# Altium PCB 5_STM32H743.PcbDoc
Units mil, origin at the board's own origin, x right, y up, seen from the top; angles counter-clockwise.
Board outline 1968.5 x 1968.5 mil, 2 copper layers (Top Layer, Bottom Layer); 60 components, 104 nets, 337 pads, 46 vias.
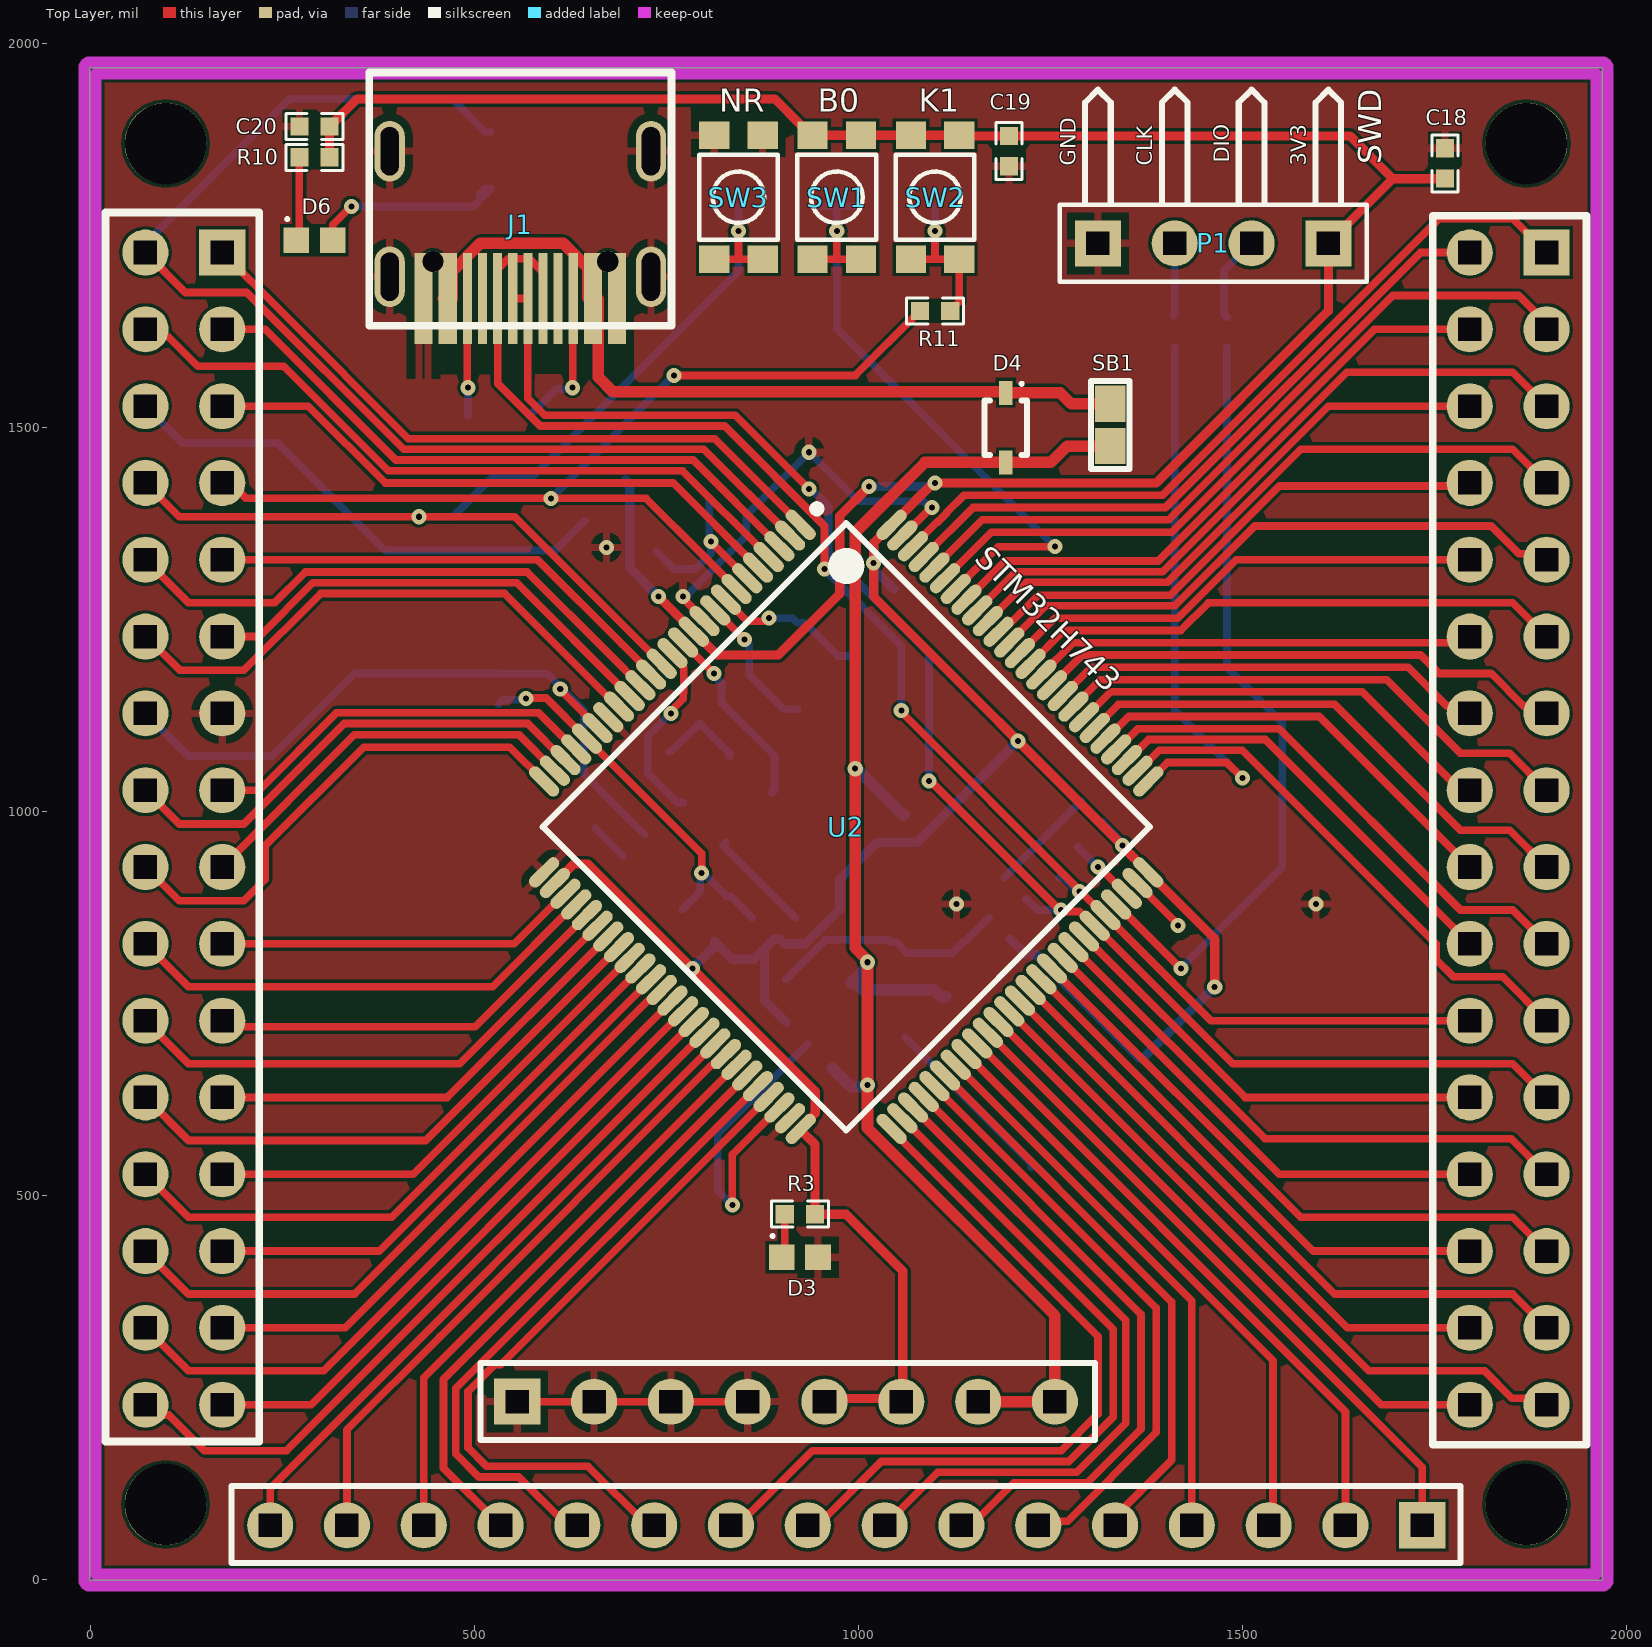
[diagram p0: Top Layer view]
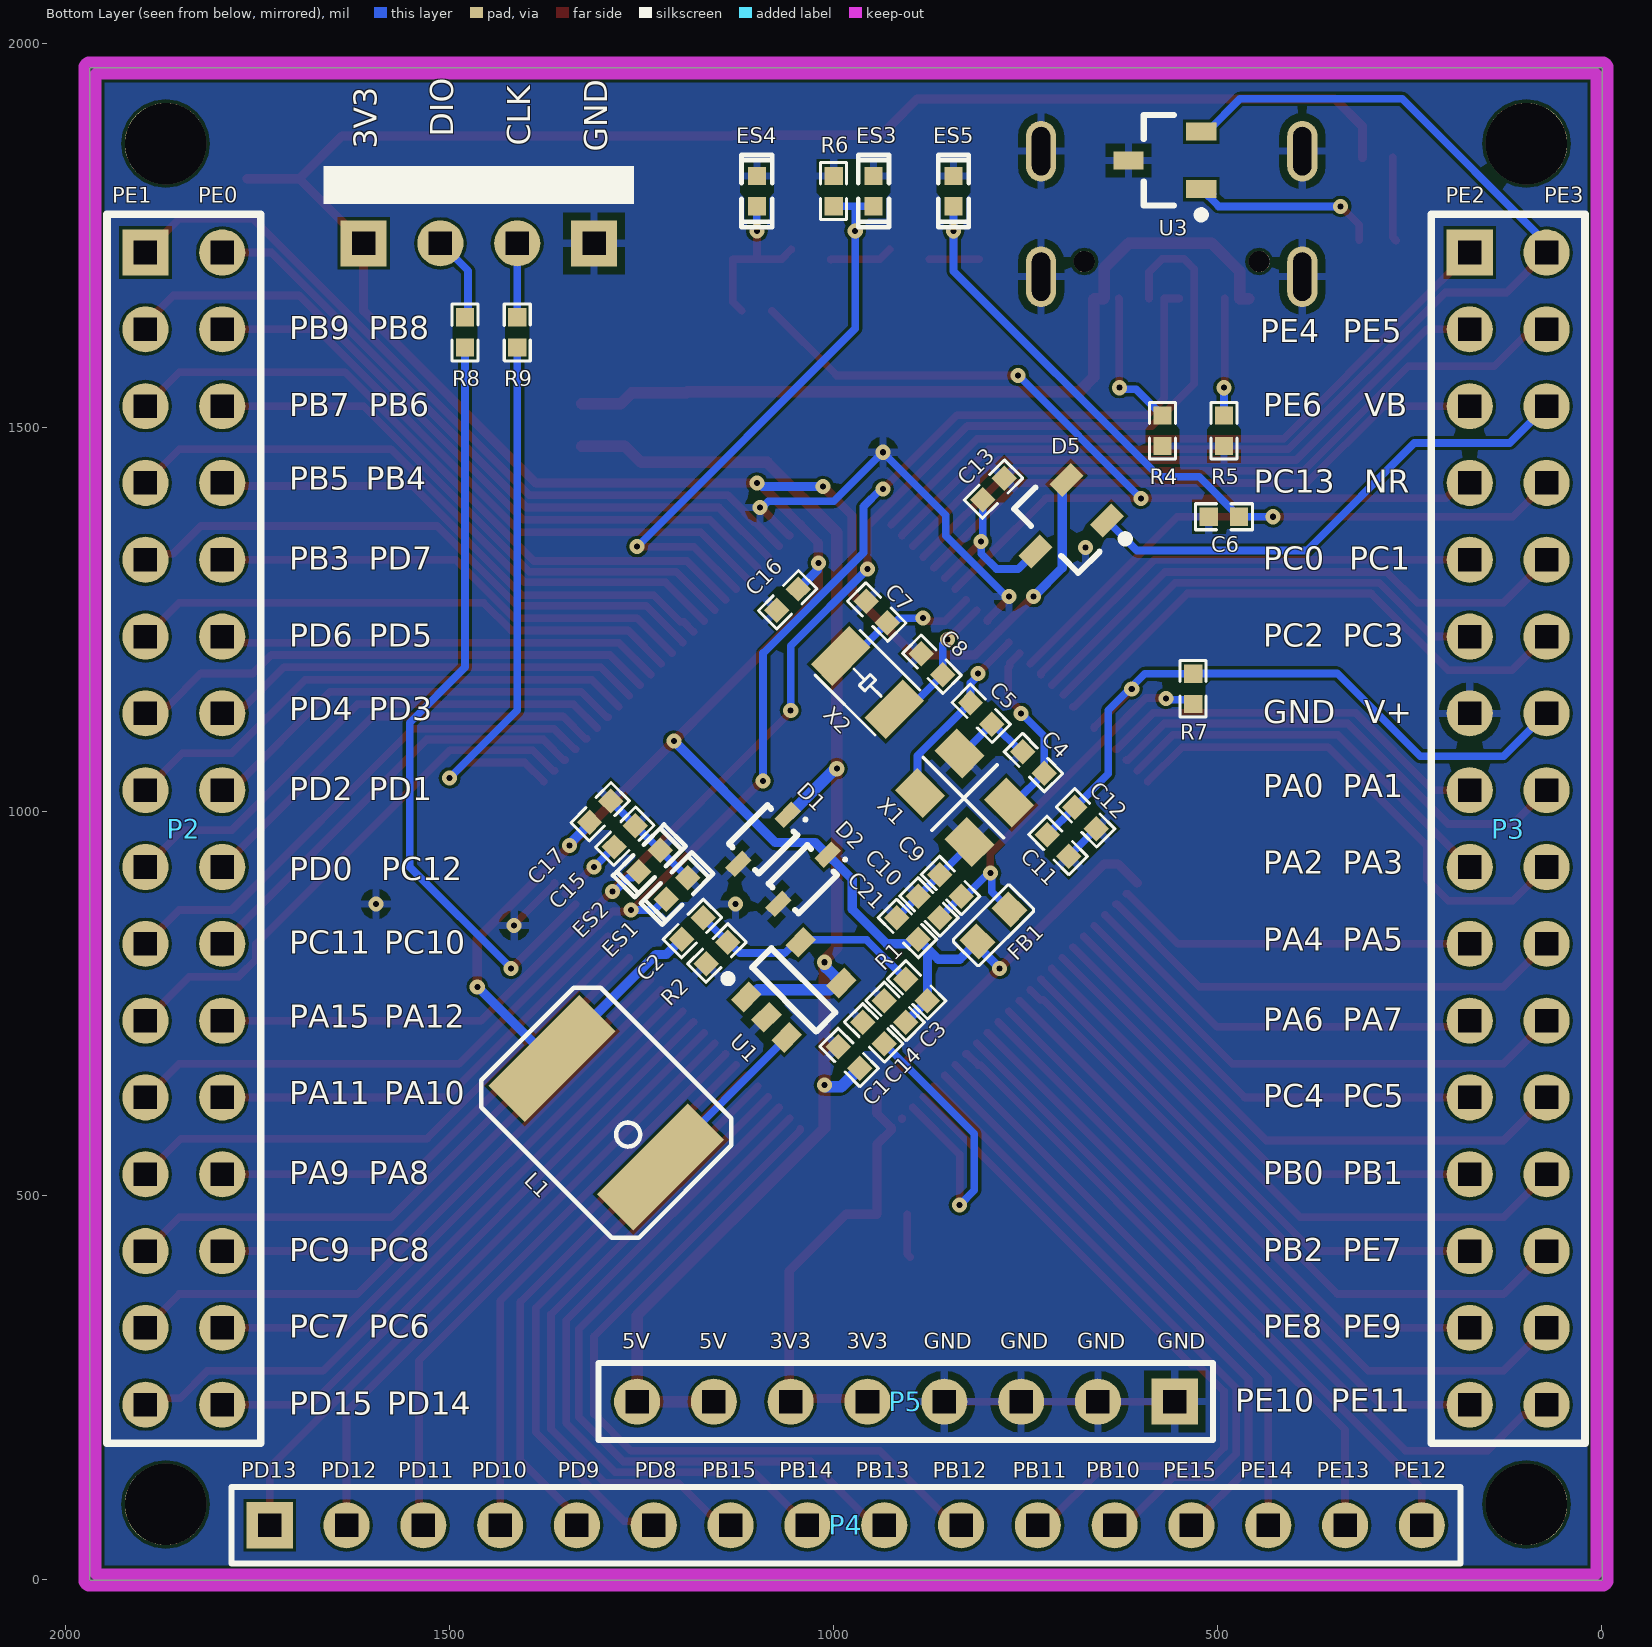
[diagram p1: Bottom Layer view, seen from below]
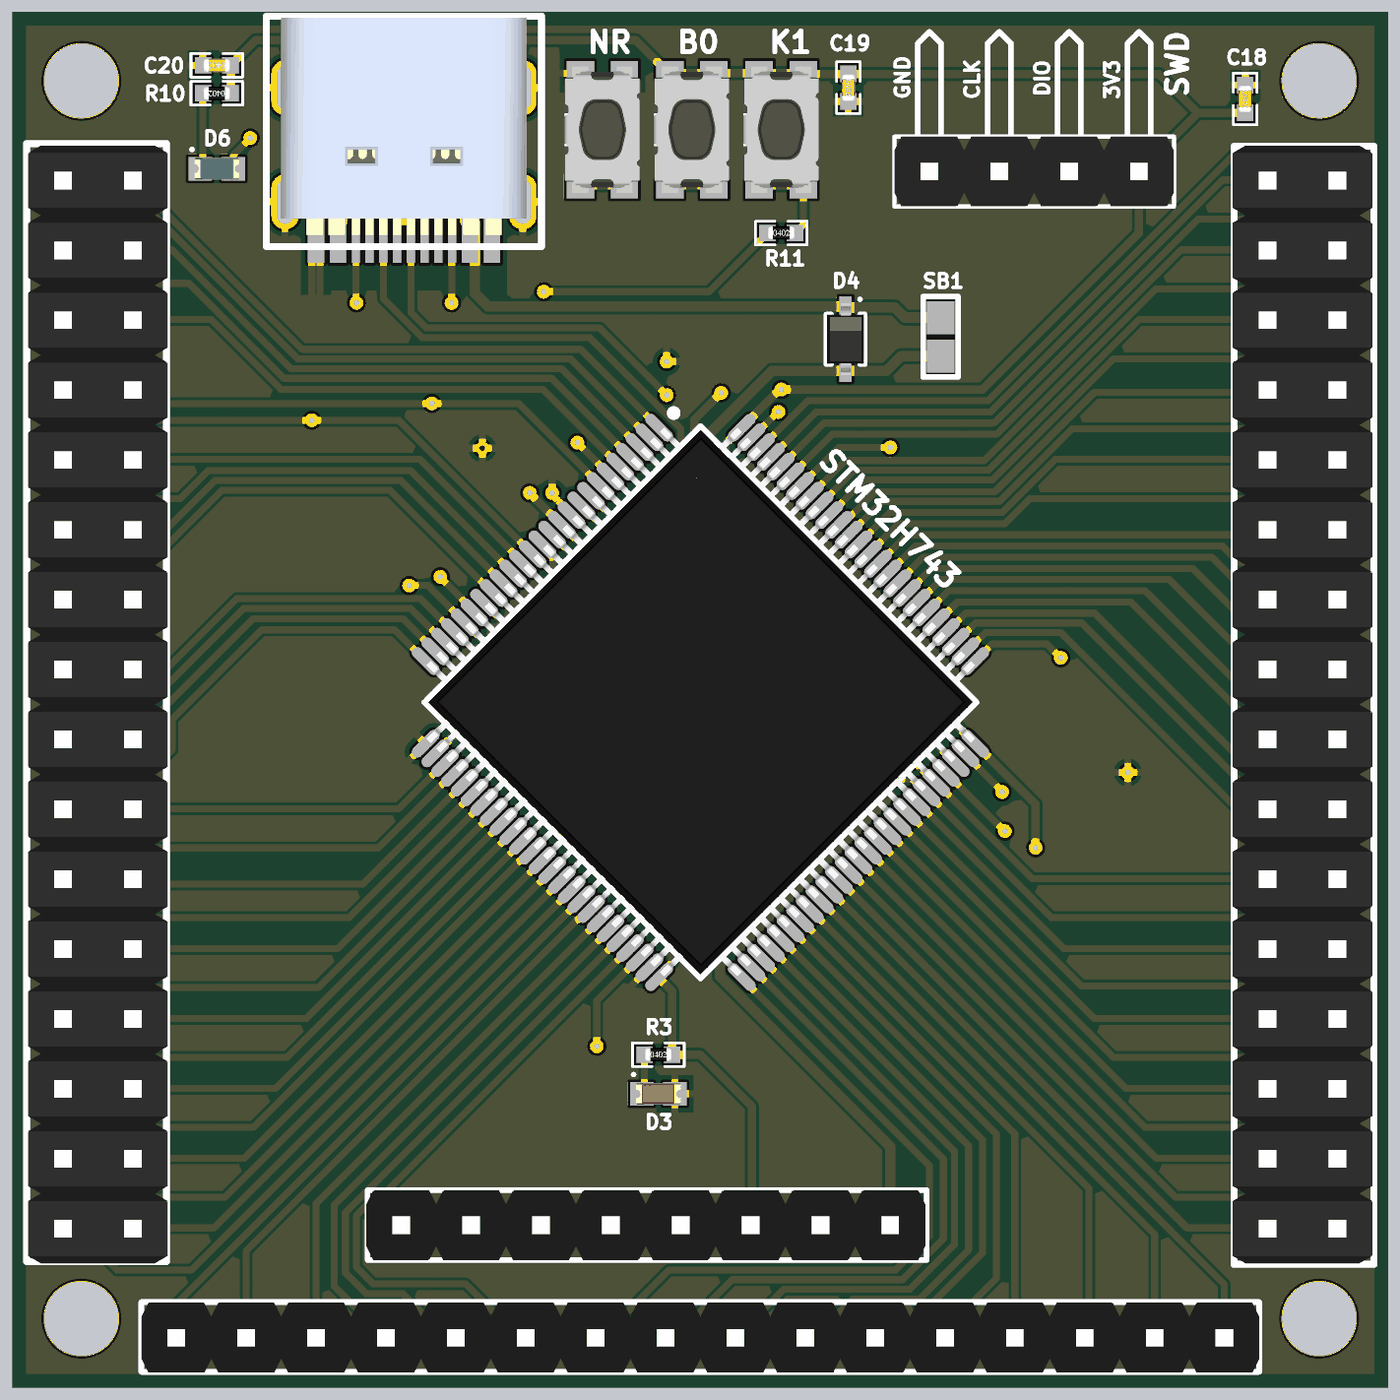
[diagram p2: 3D render of the assembled board from above, using the file's embedded part models]
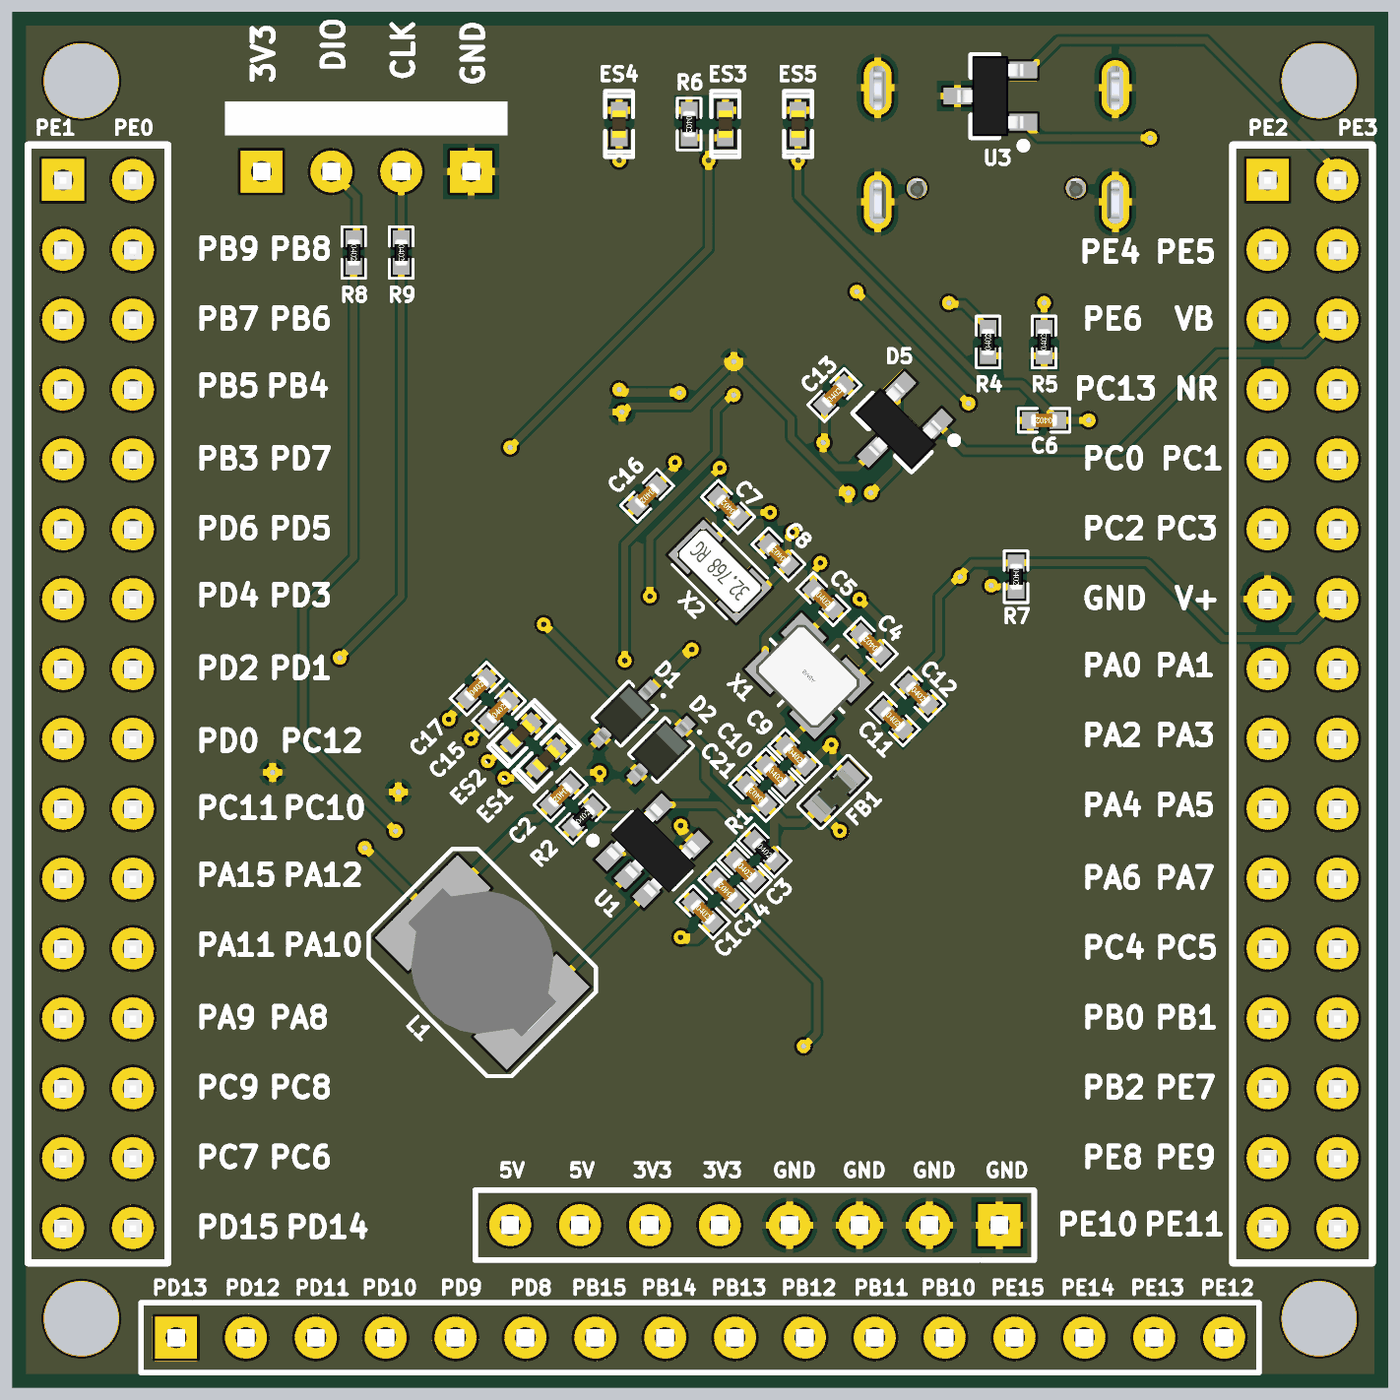
[diagram p3: 3D render of the assembled board from below, using the file's embedded part models]

## Layer stack, top to bottom
Top Solder: solder mask 0.4, Solder Resist, Dk 3.5
Top Layer: signal copper 1.4
Dielectric 1: dielectric 12.6, FR-4, Dk 4.8
Bottom Layer: signal copper 1.4
Bottom Solder: solder mask 0.4, Solder Resist, Dk 3.5

## Board outline
1968.25,-0.25 1968.25,1968.25 -0.25,1968.25 -0.25,-0.25

## Design rules (kind name [scope] priority, off if disabled: settings)
Clearance [All] p1: gap=3.9 ignorepadtopadclearanceinfootprint=FALSE
HoleSize [All] p1: absolutevalues=TRUE maxlimit=120 minlimit=1 maxpercent=80.000 minpercent=20.000
MinimumSolderMaskSliver [All] p1: minsoldermaskwidth=2.5
PolygonConnect [All] p1: connectstyle=Relief reliefconductorwidth=10 reliefentries=4 polygonreliefangle="90 Angle" airgapwidth=10
RoutingVias [All] p1: holewidth=7.87 width=19.68 viastyle="Through Hole" minholewidth=7.87 minwidth=19.68 maxholewidth=7.87 maxwidth=19.68
SilkToSilkClearance [All] p1: silktosilkclearance=2
SilkToSolderMaskClearance [IsPad] p1: minsilkscreentomaskgap=3 clearancetoexposedcopper=TRUE
SolderMaskExpansion [All] p1: expansion=4 istentingtop=FALSE
SupplyNets "Schematic Supply Nets_3" [InNet('3V3')] p1: voltage=0.000
SupplyNets "Schematic Supply Nets_2" [InNet('GND')] p2: voltage=0.000
SupplyNets "Schematic Supply Nets_1" [InNet('VBUS')] p3: voltage=0.000
SupplyNets "Schematic Supply Nets" [InNet('5V')] p4: voltage=0.000
Width 5V [InNet('5V')] p1: maxlimit=15 minlimit=6 preferedwidth=15
Width VBUS [InNet('VBUS')] p2: maxlimit=15 minlimit=6 preferedwidth=15
Width 3V3 [InNet('3V3')] p3: maxlimit=15 minlimit=6 preferedwidth=12
Width [All] p4: maxlimit=10 minlimit=10 preferedwidth=10
26 further rules are at their usual default settings.

## Classes and differential pairs
component class SWITCH: D6 ES3 ES4 ES5 R10 R11 SW1 SW2 SW3 U3
component class POWER: C1 C2 C3 D1 D2 D3 D4 ES1 ES2 J1 L1 R1 R2 R3 R4 R5 SB1 U1
component class main: C4 C5 C6 C7 C8 C9 C10 C11 C12 C13 C14 C15 C16 C17 C18 C19 C20 C21 D5 FB1 FB? P1 P2 P3 P4 P5 R6 R7 R8 R9 U2 X1 X2

## Components (designator, comment, footprint, x,y, rotation, side; value= is the part's Value field where it differs from the comment)
C1 "4.7uF" 0402_Capacitor 980,680 r225 bottom
C2 "22pF" 0402_Capacitor 1184,848 r315 bottom
C3 "10uF" 0402_Capacitor 920,740 r225 bottom
C4 "10pF" 0402_Capacitor 740,1064 r45 bottom
C5 "10pF" 0402_Capacitor 808,1128 r225 bottom
C6 "100nF" 0402_Capacitor 492,1384 r0 bottom
C7 "12pF" 0402_Capacitor 944,1260 r45 bottom
C8 "12pF" 0402_Capacitor 872,1192 r45 bottom
C9 "1uF" 0402_Capacitor 848,904 r225 bottom
C10 "100nF" 0402_Capacitor 876,876 r225 bottom
C11 "1uF" 0402_Capacitor 708,956 r225 bottom
C12 "100nF" 0402_Capacitor 672,992 r225 bottom
C13 "100nF" 0402_Capacitor 792,1420 r135 bottom
C14 "2.2uF" 0402_Capacitor 948,712 r45 bottom
C15 "2.2uF" 0402_Capacitor 1272,968 r135 bottom
C16 "100nF" 0402_Capacitor 1060,1276 r315 bottom
C17 "100nF" 0402_Capacitor 1304,1000 r135 bottom
C18 "100nF" 0402_Capacitor 1764,1844 r90 top
C19 "100nF" 0402_Capacitor 1196,1860 r270 top
C20 "100nF" 0402_Capacitor 292,1892 r180 top
C21 "4.7uF" 0402_Capacitor 904,848 r45 bottom
D1 "LESD3Z5.0T1G" SOD-323 1092,964 r315 bottom
D2 "SD03" SOD-323 1040,912 r315 bottom
D3 "RED_LED" 0603_LED_RED 924,420 r0 top
D4 "B5819WS SL" SOD-323 1192,1500 r270 top
D5 "BAT54C" SOT23_3L 704,1372 r315 bottom
D6 "BLUE_LED" 0603_LED_BLUE 292,1744 r0 top
ES1 "MKESD0402MS05" MKESD0402MS05 1204,900 r135 bottom
ES2 "MKESD0402MS05" MKESD0402MS05 1240,936 r135 bottom
ES3 "MKESD0402MS05" MKESD0402MS05 948,1808 r90 bottom
ES4 "MKESD0402MS05" MKESD0402MS05 1100,1808 r90 bottom
ES5 "MKESD0402MS05" MKESD0402MS05 844,1808 r90 bottom
FB1 "1KΩ 100MHz" 0603_Ferrite_Bead 792,852 r135 bottom
J1 "USB_C_16" USB_C_16PIN_DIP 560,1764 r180 top locked
L1 "Inductor" 2220(5650)_Inductor 1296,608 r45 bottom value=2.2uH
P1 "SWD" SWD 1462,1740 r0 top
P2 "Header 16X2" 16x2_Header 1846,978 r180 bottom locked
P3 "Header 16X2" 16x2_Header 122,978 r180 bottom locked
P4 "Header 16" 16x1_Header 984.25,71 r90 bottom
P5 "Header 8" 8x1_Header 906,232 r270 bottom
R1 "Res1" 0402_Resistor 892,768 r225 bottom value=680K
R2 "Res1" 0402_Resistor 1152,816 r135 bottom value=150K
R3 "Res1" 0402_Resistor 924,476 r0 top value=5.1K
R4 "Res1" 0402_Resistor 572,1496 r90 bottom value=5.1K
R5 "Res1" 0402_Resistor 492,1496 r90 bottom value=5.1K
R6 "10KΩ" 0402_Resistor 1000,1808 r270 bottom
R7 "0R" 0402_Resistor 532,1160 r270 bottom
R8 "22R" 0402_Resistor 1480,1624 r270 bottom
R9 "22R" 0402_Resistor 1412,1624 r270 bottom
R10 "Res1" 0402_Resistor 292,1852 r180 top value=1.5KΩ
R11 "Res1" 0402_Resistor 1100,1652 r0 top value=330R
SB1 "SB1" SB 1328,1476 r90 top
SW1 "3x4x2.5" TACT_switch 972,1800 r90 top
SW2 "3x4x2.5" TACT_switch 1100,1800 r90 top
SW3 "3x4x2.5" TACT_switch 844,1800 r90 top
U1 "XT3410" SOT23_5L 1052,768 r135 bottom
U2 "STM32H743" LQFP100Pin 984.25,980.25 r315 top locked
U3 "NPN" SOT23_3L 568.8,1848 r0 bottom
X1 "25Mhz 10pF" XTAL_25MHz 772,1012 r45 bottom
X2 "32.768KHz" XTAL_32.768KHz 956,1168 r45 bottom

## Footprints (in the part's own frame and the unit in brackets; to place one, negate y for a bottom-side part, rotate by r counter-clockwise, add the part's x,y. Pads: shape width x height; smd on the part's side, far side on the other; paste and mask are expansions set on the pad)
8x1_Header [mil]
  rect 60x60 hole 30 square: 1(0,350)
  round 60 hole 30 square: 2(0,250) 3(0,150) 4(0,50) 5(0,-50) 6(0,-150) 7(0,-250) 8(0,-350)
  silkscreen extent -50,-400 50,400, body extent -50,-400 50,400, height 102
16x1_Header [mil]
  rect 60x60 hole 30 square: 1(0,750)
  round 60 hole 30 square: 2(0,650) 3(0,550) 4(0,450) 5(0,350) 6(0,250) 7(0,150) 8(0,50) 9(0,-50) 10(0,-150) 11(0,-250) 12(0,-350) 13(0,-450) 14(0,-550) 15(0,-650) 16(0,-750)
  silkscreen extent -50,-800 50,800, body extent -50,-800 50,800, height 102
16x2_Header [mil]
  rect 60x60 hole 30 square: 1(-50,750)
  round 60 hole 30 square: 2(50,750) 3(-50,650) 4(50,650) 5(-50,550) 6(50,550) 7(-50,450) 8(50,450) 9(-50,350) 10(50,350) 11(-50,250) 12(50,250) 13(-50,150) 14(50,150) 15(-50,50) 16(50,50) 17(-50,-50) 18(50,-50) 19(-50,-150) 20(50,-150) 21(-50,-250) 22(50,-250) 23(-50,-350) 24(50,-350) 25(-50,-450) 26(50,-450) 27(-50,-550) 28(50,-550) 29(-50,-650) 30(50,-650) 31(-50,-750) 32(50,-750)
  silkscreen extent -100,-800 100,800, body extent -100,-800 100,800, height 102
0402_Capacitor [mm]
  rect 0.6x0.6 smd: 1(-0.5,0) 2(0.5,0)
  silkscreen extent -0.94,-0.43 0.94,0.43, body extent -0.5,-0.25 0.5,0.25, height 0.3
0402_Resistor [mm]
  rect 0.6x0.6 smd: 1(-0.5,0) 2(0.5,0)
  silkscreen extent -0.94,-0.43 0.94,0.43, body extent -0.5,-0.25 0.5,0.25, height 0.3
0603_Ferrite_Bead [mm]
  rect 0.8x0.9 smd: 1(-0.75,0) 2(0.75,0)
  silkscreen extent -1.32,-0.61 1.32,0.61, body extent -0.8,-0.4 0.8,0.4, height 0.8
0603_LED_BLUE [mm] "Molded Diode, 2-Leads, Body 1.60x0.80mm, IPC Medium Density"
  rect 0.85x0.85 smd: 1(-0.6,0) 2(0.6,0)
  silkscreen extent -0.95,0.65 -0.85,0.75, body extent -0.81,-0.4 0.81,0.4, height 0.6
0603_LED_RED [mm] "Molded Diode, 2-Leads, Body 1.60x0.80mm, IPC Medium Density"
  rect 0.85x0.85 smd: 1(-0.6,0) 2(0.6,0)
  silkscreen extent -0.95,0.65 -0.85,0.75, body extent -0.81,-0.4 0.81,0.4, height 0.6
2220(5650)_Inductor [mm]
  rect 1.7x4.25 smd: 1(-2.54,0) 2(2.54,0)
  silkscreen extent -3.68,-2.79 3.68,2.79, body extent -2.93,-2.6 2.93,2.6, height 1.85
LQFP100Pin [mm] "TSQFP, 100-Leads, Body 15.00x15.00mm, Pitch 0.50mm, IPC Medium Density"
  oval 1.25x0.4 smd: 1(-8.125,6) 2(-8.125,5.5) 3(-8.125,5) 4(-8.125,4.5) 5(-8.125,4) 6(-8.125,3.5) 7(-8.125,3) 8(-8.125,2.5) 9(-8.125,2) 10(-8.125,1.5) 11(-8.125,1) 12(-8.125,0.5) 13(-8.125,0) 14(-8.125,-0.5) 15(-8.125,-1) 16(-8.125,-1.5) 17(-8.125,-2) 18(-8.125,-2.5) 19(-8.125,-3) 20(-8.125,-3.5) 21(-8.125,-4) 22(-8.125,-4.5) 23(-8.125,-5) 24(-8.125,-5.5) 25(-8.125,-6) 51(8.125,-6) 52(8.125,-5.5) 53(8.125,-5) 54(8.125,-4.5) 55(8.125,-4) 56(8.125,-3.5) 57(8.125,-3) 58(8.125,-2.5) 59(8.125,-2) 60(8.125,-1.5) 61(8.125,-1) 62(8.125,-0.5) 63(8.125,0) 64(8.125,0.5) 65(8.125,1) 66(8.125,1.5) 67(8.125,2) 68(8.125,2.5) 69(8.125,3) 70(8.125,3.5) 71(8.125,4) 72(8.125,4.5) 73(8.125,5) 74(8.125,5.5) 75(8.125,6)
  oval 0.4x1.25 smd: 26(-6,-8.125) 27(-5.5,-8.125) 28(-5,-8.125) 29(-4.5,-8.125) 30(-4,-8.125) 31(-3.5,-8.125) 32(-3,-8.125) 33(-2.5,-8.125) 34(-2,-8.125) 35(-1.5,-8.125) 36(-1,-8.125) 37(-0.5,-8.125) 38(0,-8.125) 39(0.5,-8.125) 40(1,-8.125) 41(1.5,-8.125) 42(2,-8.125) 43(2.5,-8.125) 44(3,-8.125) 45(3.5,-8.125) 46(4,-8.125) 47(4.5,-8.125) 48(5,-8.125) 49(5.5,-8.125) 50(6,-8.125) 76(6,8.125) 77(5.5,8.125) 78(5,8.125) 79(4.5,8.125) 80(4,8.125) 81(3.5,8.125) 82(3,8.125) 83(2.5,8.125) 84(2,8.125) 85(1.5,8.125) 86(1,8.125) 87(0.5,8.125) 88(0,8.125) 89(-0.5,8.125) 90(-1,8.125) 91(-1.5,8.125) 92(-2,8.125) 93(-2.5,8.125) 94(-3,8.125) 95(-3.5,8.125) 96(-4,8.125) 97(-4.5,8.125) 98(-5,8.125) 99(-5.5,8.125) 100(-6,8.125)
  silkscreen extent -8.25,-7.1 7.1,7.1, body extent -8,-7.98 8,8.02, height 1.48
MKESD0402MS05 [mm]
  rect 0.6x0.6 smd: 1(-0.5,0) 2(0.5,0)
  silkscreen extent -1.19,-0.51 1.19,0.51, body extent -0.5,-0.25 0.5,0.25, height 0.36
SB [mm]
  rect 1.2x1 smd: 1(0,0) 2(1.397,0)
  silkscreen extent -0.76,-0.64 2.16,0.63
SOD-323 [mm] "SODFL, 2-Leads, Body 1.25x2.50mm, IPC Medium Density"
  rect 0.8x0.45 smd: 1(-1.15,0) 2(1.15,0)
  silkscreen extent -1.5,-0.7 0.9,0.7, body extent -1.3,-0.67 1.3,0.67, height 1.1
SOT23_3L [mm] "SOT23, 3-Leads, Body 2.90x2.45mm, Pitch 0.95mm, IPC Medium Density"
  rect 1x0.6 smd: 1(-1.2,0.95) 2(-1.2,-0.95) 3(1.2,0)
  silkscreen extent -1.32,-1.5 0.7,1.92, body extent -1.2,-1.46 1.2,1.46, height 0.98
SOT23_5L [mm] "SOT23, 5-Leads, Body 2.91x2.45mm, Pitch 0.95mm, IPC Medium Density"
  rect 0.85x0.6 smd: 1(-1.275,0.95) 2(-1.275,0) 3(-1.275,-0.95) 4(1.275,-0.95) 5(1.275,0.95)
  silkscreen extent -1.4,-1.5 0.45,1.92, body extent -1.22,-1.5 1.28,1.5, height 1.1
SWD [mil]
  rect 60x60 hole 30 square: 1(150,0) 4(-150,0)
  round 60 hole 30 square: 2(50,0) 3(-50,0)
  silkscreen extent -200,-50 200,200, body extent -200,-50 200,50, height 336
TACT_switch [mm] "KMR742NG LFS"
  rect 0.9x1 smd: 1(2.05,0.8) 2(2.05,-0.8) 3(-2.05,-0.8) 4(-2.05,0.8)
  silkscreen extent -1.4,-1.3 1.4,1.3, body extent -2.3,-1.4 2.3,1.4, height 1.92
USB_C_16PIN_DIP [mm]
  round 0.7 hole 0.7: 0(-2.89,1.212) 0(2.89,1.212)
  rect 0.3x3 smd: 1(-3.35,2.437) 2(-3.05,2.437) 3(-2.55,2.437) 4(-2.25,2.437) 5(-1.75,2.437) 6(-1.25,2.437) 7(-0.75,2.437) 8(-0.25,2.437) 9(0.25,2.437) 10(0.75,2.437) 11(1.25,2.437) 12(1.75,2.437) 13(2.25,2.437) 14(2.55,2.437) 15(3.05,2.437) 16(3.35,2.437)
  oval 1x2 hole 0.6 slot 1.6 at 90 deg: S1(-4.32,1.713) S2(-4.32,-2.437) S3(4.32,-2.437) S4(4.32,1.713)
  silkscreen extent -5,-5.04 5,3.34, body extent -4.47,-4.99 4.47,2.91, height 3.2
XTAL_25MHz [mm]
  rect 1.3x1.05 smd: 1(0,0) 2(2.3,0) 3(2.3,1.85) 4(0,1.85)
  silkscreen extent -0.7,-0.6 3.05,2.45, body extent -0.46,-0.31 2.74,2.19, height 0.75
XTAL_32.768KHz [mm]
  rect 1x1.8 smd: 1(-1.25,0) 2(1.25,0)
  silkscreen extent -1.4,-1.05 1.4,1.05, body extent -1.6,-0.75 1.6,0.75, height 0.71

## Part data
C1 C2 C3: library part Cap, "Capacitor", LatestRevisionDate=17-Jul-2002, LatestRevisionNote="Re-released for DXP Platform.", PackageDescription="Radial Cap, Thru-Hole; 2 Leads; 0.3 in Pin Spacing", PackageReference=RAD-0.3, Published=8-Jun-2000, Publisher="Altium Limited"
C4 C5 C6 C7 C8 C9 C10 C11 C12 C13 C14 C15 C16 C17 C18 C19 C20 C21: library part CAP-Chip, "SMDCapacitor"
D1 D2: library part Diode
D3 D6: library part LED0, "Typical INFRARED GaAs LED", LatestRevisionDate=08-Jul-2005, LatestRevisionNote="Mech Layer 1 removed.", PackageDescription="LED; 2 Leads", PackageReference=LED-0, Published=8-Jun-2000, Publisher="Altium Limited"
D4: library part Diode, "Default Diode", Code_JEDEC=DO-214-AB, LatestRevisionDate=17-Jul-2002, LatestRevisionNote="Re-released for DXP Platform.", PackageDescription="DO-214-AB/SMC; 2 C-Bend Leads; Body 7.9 x 5.9 mm, inc. leads (LxW)", PackageReference=SMC, PackageVersion=Sep-1996, Published=8-Jun-2000, Publisher="Altium Limited"
ES1 ES2 ES3 ES4 ES5: library part ESD1
FB1: library part FB1
P1: library part "Header 4H", "Header, 4-Pin, Right Angle", LatestRevisionDate=17-Jul-2002, LatestRevisionNote="Re-released for DXP Platform.", Publisher="Altium Limited"
P2 P3: "Header, 16-Pin, Dual row", LatestRevisionDate=17-Jul-2002, LatestRevisionNote="Re-released for DXP Platform.", Publisher="Altium Limited"
P4: "Header, 16-Pin", LatestRevisionDate=17-Jul-2002, LatestRevisionNote="Re-released for DXP Platform.", Publisher="Altium Limited"
P5: "Header, 8-Pin", LatestRevisionDate=17-Jul-2002, LatestRevisionNote="Re-released for DXP Platform.", Publisher="Altium Limited"
R1 R2 R3 R4 R5 R10 R11: "Resistor", LatestRevisionDate=17-Jul-2002, LatestRevisionNote="Re-released for DXP Platform.", PackageDescription="Axial Device, Thru-Hole; 2 Leads; 0.3 in Pin Spacing", PackageReference=AXIAL-0.3, Published=8-Jun-2000, Publisher="Altium Limited"
R6 R7 R8 R9: library part Res1, "Resistor", LatestRevisionDate=17-Jul-2002, LatestRevisionNote="Re-released for DXP Platform.", PackageDescription="Axial Device, Thru-Hole; 2 Leads; 0.3 in Pin Spacing", PackageReference=AXIAL-0.3, Published=8-Jun-2000, Publisher="Altium Limited"
SW1 SW2 SW3: library part SW1
U1: library part XT3410_My
U3: library part NPN_REC2
X1: library part XTAL_25MHz
X2: library part CRYSTAL, "Crystal"
L1: Code_IEC=1005, Code_JEITA=0402, LatestRevisionDate=29-May-2009, LatestRevisionNote="IPC-7351 Footprint Added.", PackageDescription="Chip Inductor", PackageReference=0402-A, Published=8-Jun-2000, Publisher="Altium Limited"

## Free pads (board coordinates)
  round 106.3 hole 106.3: 1(98.17,98.17) 1(98.17,1869.83) 1(1869.83,98.17) 1(1869.83,1869.83)

## Via types
v1: diameter 19.68, hole 7.87, Top Layer to Bottom Layer, 46 vias

## Nets (pads, with @x,y where several pads share a name; then routed paths per layer and width w, separated by ;. In a path a pad name is that pad's centre, name@x,y a point inside that pad or via, vN(x,y) a via of type N, cw(c..) or ccw(c..) an arc to the next point about the centre after c; other vN are vias at no path point)
3V3: C2.2 C3.2 C16.1 C17.1 C18.1 C19.1 C20.1 C21.1 D2.1 D5.2 FB1.1 L1.2 P1.1 P5.5 P5.6 R1.2 R3.2 R10.1 SW1.1 SW1.2 SW2.1 SW2.2 U2.11 U2.27 U2.50 U2.75 U2.100 | length 6166.8
  Top Layer w12: R10.1 C20.1 347.69,1928 891.28,1928 SW1.1@925.82,1893.46 ; U2.27 629.77,932 648,932 v1(784,796) 944,636 944,607.49 925.09,588.58 U2.50 ; v1(740,1280) 740.09,1280 785.81,1234.28 U2.11 816,1204.18 896.18,1204.18 975.74,1283.74 975.74,1385.11 v1(1013.98,1423.34) ; U2.50@925.09,585.47 943.69,566.88 R3.2 984,476 1058,402 1058,236 P5.5@956.78,236 ; SW1.1@925.82,1893.43 938.53,1880.71 SW1.1 SW1.2 SW2.1 SW2.2 1132.52,1879.68 C19.1 1640.31,1879.68 1696,1824 ; v1@1343.28,955.28 U2.75 1464,834.57 v1(1464,772) ; v1(1344,956) 1020,1280 v1(1020,1324) 1020,1350.1 U2.100 1073.26,1403.32 1073.26,1403.76 1097.49,1428 v1(1100,1428) 1388,1428 1612,1652 P1.1 1696,1824 ; C18.1 1763.68,1824 1696,1824
  Bottom Layer w12: D5.2 702.61,1426.29 702.61,1317.39 v1(740,1280) ; v1(784,796) 812.88,824.88 FB1.1 836,808 864,808 878.08,822.08 ; C3.2 R1.2 878.08,822.08 ; v1(1013.98,1423.34) 1092.72,1423.34 1097.38,1428 v1(1100,1428) v1@1100,1427.92 ; v1(1020,1324) 1021.47,1322.53 1021.47,1314.53 C16.1 ; C2.2 1218,814 1231.42,814 L1.2 1370.35,678.71 v1@1463.64,772 ; v1(1208,1092) 1076,960 1023.97,960 976,912.03 976,873.07 930.93,828 904.38,828 898.3,834.08 C21.1 878.08,822.08 ; C17.1 1317.92,984.08 1344,958 v1(1344,956)
5V: C1.2 D1.1 D4.2 P5.7 P5.8 SB1.1 U1.1 U1.4 | length 2025.6
  Top Layer w15: P5.7@1161.41,232 P5.8 1256,344 1012,588 v1(1012,644) v1(1012,804) 1012,806.62 996,822.62 v1(996,1056) 996,1364 1086.72,1454.72 D4.2 1250.72,1454.72 1272,1476 SB1.1
  Bottom Layer w15: C1.2 990.08,642.08 990.15,642.15 1010.15,642.15 v1(1012,644) ; v1(996,1056) 998,1056 1057.99,996.01 D1.1 ; v1(1012,804) 1010.15,802.15 1010.15,797.13 U1.4 996.16,777.05 1005.2,768 1098.8,768 1107.84,758.95 U1.1
BOOT0: ES3.1 R6.2 SW1.3 SW1.4 U2.94 | length 884.6
  Top Layer w10: SW1.4@927.3,1732.01 940.01,1719.29 971.75,1719.29 ; v1(972,1756) 972,1719.54 971.75,1719.29 ; SW1.3@1004,1718.79 SW1.3 971.75,1719.29 ; U2.94 1182.08,1345.11 v1(1256,1345.11)
  Bottom Layer w10: ES3.1 974,1788.31 ; R6.2 974,1788.31 ; v1(1256,1345.11) 972,1629.11 v1(972,1756) 972,1786.31 974,1788.31
GND: C1.1 C3.1 C4.2 C5.2 C6.2 C7.2 C8.2 C9.1 C10.1 C11.2 C12.2 C13.2 C14.2 C15.2 C16.2 C17.2 C18.2 C19.2 C20.2 C21.2 D1.2 D2.2 D3.2 ES1.2 ES2.2 ES3.2 ES4.2 ES5.2 J1.1 J1.2 J1.15 J1.16 J1.S1 J1.S2 J1.S3 J1.S4 P1.4 P3.13 P5.1 P5.2 P5.3 P5.4 R2.1 R4.1 R5.1 R6.1 SW3.1 SW3.2 U1.2 U2.10 U2.19 U2.26 U2.49 U2.74 U2.99 U3.3 X1.2 X1.4 | length 1365.7
  Top Layer w10: P5.1@557.31,232 P5.4@857.31,232 ; v1(772,1280) 772,1277.57 799.82,1249.76 U2.10 ; U2.49@911.17,600.06 U2.49 ; U2.99 1058.44,1359.56 1094.89,1396 v1(1096,1396) ; U2.74 1363.56,905.81 1416,853.37 v1(1416,852)
  Bottom Layer w10: C12.2 C11.2 ; C4.2 755.92,1077.92 792.08,1114.08 C5.2 832.24,1075.92 X1.2@832.24,1072.24 ; v1(772,1280) 774.51,1280 854,1359.49 854,1386 v1(936,1468) 1000,1404 1085.38,1404 1093.38,1396 v1(1096,1396) ; X1.4@826.98,959.82 823.5,956.34 C9.1 C10.1 C21.2 ; ES1.2 ES2.2 C15.2 C17.2
  other v1: 1128,880 1596,880 672,1344
NetC2_1: C2.1 R1.1 R2.2 U1.5 | length 311.7
  Bottom Layer w10: R1.1 957.42,833.42 1039.47,833.42 U1.5 1050.05,829.94 1063.99,816 1122.37,816 1136.28,829.92 R2.2 C2.1
NetC4_1: C4.1 U2.13 X1.1 | length 243.5
  Top Layer w10: v1(756,1128) 756,1130.57 772.28,1146.85 772.28,1153.92 772.75,1154.39 772.75,1187.64 770.99,1189.39 770.99,1193.51 U2.13
  Bottom Layer w10: v1(756,1128) 726.08,1098.08 C4.1 764.16,1012 X1.1
NetC5_1: C5.1 U2.12 X1.3 | length 246.6
  Top Layer w10: U2.12 771.98,1220.19 812,1180.17 v1(812,1180)
  Bottom Layer w10: v1(812,1180) 812,1177.38 821.92,1167.46 C5.1 891.01,1072.83 891.01,1028.01 X1.3
NetC9_2: C9.2 C10.2 FB1.2 R7.2 U2.21 | length 524.2
  Top Layer w10: v1(567.44,1147.44) 568,1148 593.79,1148 U2.21 646.7,1094.79 796,945.49 v1(796,920)
  Bottom Layer w10: R7.2 537.27,1145.58 565.58,1145.58 v1(567.44,1147.44) ; FB1.2 794.25,896.01 794.25,918.26 v1(796,920) 798.62,920 828.54,890.08 C9.2 C10.2
NetC14_1: C14.1 U2.48 | length 418.8
  Top Layer w10: v1(836,488) 836,553.61 U2.48
  Bottom Layer w10: v1(836,488) 816.84,507.16 816.84,580.84 C14.1
NetC15_1: C15.1 U2.73 | length 88.9
  Top Layer w10: v1(1312,928) 1313.45,928 1348.19,893.26 U2.73
  Bottom Layer w10: C15.1 v1(1312,928)
NetD3_1: D3.1 R3.1 | length 57.6
  Top Layer w10: D3.1 904.32,423.94 R3.1
NetD6_1: D6.1 R10.2 | length 110.2
  Top Layer w10: D6.1@268,1743.62 272.32,1747.94 R10.2
NetD6_2: D6.2 U3.1 | length 262.5
  Top Layer w10: D6.2 316,1744.38 316,1764 v1(340,1788)
  Bottom Layer w10: v1(340,1788) 498.96,1788 U3.1 513.69,1810.6 U3.1@506.87,1803.79
NetES4_1: ES4.1 R11.2 SW2.3 SW2.4 | length 222.8
  Top Layer w10: SW2.4@1055.3,1732.01 1068.01,1719.29 1099.75,1719.29 ; v1(1100,1756) 1099.75,1755.75 1099.75,1719.29 ; R11.2 1131.5,1663.81 SW2.3 1099.75,1719.29
  Bottom Layer w10: v1(1100,1756) ES4.1
NetL1_1: L1.1 U1.3 | length 236.8
  Bottom Layer w10: U1.3 1225.29,541.82 L1.1
NetP1_2: P1.2 R8.1 | length 112.9
  Bottom Layer w10: R8.1 1476,1647.68 1476,1704 P1.2
NetP1_3: P1.3 R9.1 | length 95.1
  Bottom Layer w10: R9.1@1410,1645.68 1412,1647.68 P1.3
NRST: C6.1 ES5.1 P3.8 SW3.3 SW3.4 U2.14 | length 1506.8
  Top Layer w10: P3.8 116,1384 v1(428,1384) 552.66,1384 U2.14 ; SW3.4@810.53,1719.29 843.01,1719.29 ; v1(844,1756) 844,1720.28 843.01,1719.29 ; SW3.3@873.53,1719.29 SW3.3 843.01,1719.29
  Bottom Layer w10: v1(428,1384) C6.1 524.31,1436 576.32,1436 844,1703.68 v1(844,1756) ES5.1
PA0: P3.15 U2.22 | length 522.2
  Top Layer w10: P3.15 220,1028 320.69,1128.69 583.7,1128.69 631.23,1081.17 U2.22
PA1: P3.16 U2.23 | length 638.9
  Top Layer w10: P3.16 116,984 200,984 330.79,1114.79 569.76,1114.79 617.31,1067.25 U2.23
PA2: P3.17 U2.24 | length 523.5
  Top Layer w10: P3.17 344,1100 558.27,1100 U2.24
PA3: P3.18 U2.25 | length 664.3
  Top Layer w10: P3.18 116,884 200,884 228,912 228,956 356,1084 546.44,1084 U2.25
PA4: P3.19 U2.28 | length 473.9
  Top Layer w10: P3.19 552.05,828 617.31,893.26 U2.28
PA5: P3.20 U2.29 | length 628.4
  Top Layer w10: P3.20 128,772 523.89,772 631.23,879.34 U2.29
PA6: P3.21 U2.30 | length 538.3
  Top Layer w10: P3.21 180,720 501.29,720 U2.30
PA7: P3.22 U2.31 | length 686.2
  Top Layer w10: P3.22 128,672 481.13,672 U2.31
PA8: P2.26 U2.67 | length 646.6
  Top Layer w10: U2.67 1547.86,528 P2.26
PA9: P2.25 U2.68 | length 738.4
  Top Layer w10: U2.68 1529.6,574.1 1849.9,574.1 P2.25
PA10: P2.24 U2.69 | length 588.9
  Top Layer w10: U2.69 1503.54,628 P2.24
PA11: ES1.1 J1.8 J1.9 P2.23 U2.70 | length 2037.4
  Top Layer w10: J1.9 J1.8 569.84,1538.16 592,1516 840,1516 v1(936,1420) ; v1(1092,1040) 1094,1040 1262,872 v1(1264,872) 1265.85,870.15 1287.67,870.15 1306.32,851.5 U2.70 1487.38,672 1852,672 P2.23
  Bottom Layer w10: v1(936,1420) 938.62,1420 961.26,1397.36 961.26,1337.25 1092,1206.51 v1(1092,1040) ; ES1.1 1219.39,886.08 1233.47,872 v1(1264,872)
PA12: ES2.1 J1.7 J1.10 P2.22 U2.71 | length 1982.4
  Top Layer w10: J1.7 589.53,1702.47 572,1720 544,1720 530.47,1706.47 J1.10 530.47,1557.53 585.9,1502.1 825.9,1502.1 956,1372 v1(956,1316) ; v1(1056,1132) 1056,1130 1288,898 v1(1288,896) 1289.66,896 1320.24,865.42 U2.71 1459.21,728 P2.22
  Bottom Layer w10: v1(956,1316) 1056,1216 v1(1056,1132) ; ES2.1@1261.92,914.08 1267.3,914.08 1285.38,896 v1(1288,896)
PA13: R8.2 U2.72 | length 1011.6
  Top Layer w10: U2.72 1336.19,879.34 1419.53,796 v1(1420,796)
  Bottom Layer w10: v1(1420,796) 1552,928 1552,1116 1480,1188 R8.2
PA14: R9.2 U2.76 | length 737.8
  Top Layer w10: U2.76 1402.07,1064 1480,1064 v1(1500,1044)
  Bottom Layer w10: R9.2 1412,1132 v1(1500,1044)
PA15: P2.21 U2.77 | length 701
  Top Layer w10: U2.77 1365.11,1053.33 1391.78,1080 1500,1080 1752,828 1752,808 1774.93,785.07 1838.93,785.07 P2.21
PB0: P3.25 U2.34 | length 647.1
  Top Layer w10: P3.25 420.64,528 U2.34
PB1: P3.26 U2.35 | length 801.6
  Top Layer w10: P3.26 128,472 392.48,472 U2.35
PB2: P3.27 U2.36 | length 704.8
  Top Layer w10: P3.27 376.32,428 U2.36
PB3: P2.9 U2.89 | length 780.5
  Top Layer w10: U2.89 1244.16,1268 1412,1268 1516,1372 1824,1372 1860.18,1335.82 1888.18,1335.82 P2.9
PB4: P2.8 U2.90 | length 693.6
  Top Layer w10: U2.90 1195.53,1247.21 1199.65,1247.21 1234.34,1281.9 1405.9,1281.9 1548.03,1424.03 1792.03,1424.03 P2.8
PB5: P2.7 U2.91 | length 838.2
  Top Layer w10: U2.91 1219.05,1298.57 1402.57,1298.57 1576,1472 1852,1472 P2.7
PB6: P2.6 U2.92 | length 751.4
  Top Layer w10: U2.92 1205.11,1312.47 1396.47,1312.47 1612,1528 P2.6
PB7: P2.5 U2.93 | length 896
  Top Layer w10: U2.93 1191.17,1326.37 1390.37,1326.37 1636,1572 1852,1572 P2.5
PB8: P2.4 U2.95 | length 817.2
  Top Layer w10: U2.95 1173.13,1364 1408,1364 1672,1628 P2.4
PB9: P2.3 U2.96 | length 966.5
  Top Layer w10: U2.96 1161.29,1380 1404,1380 1696,1672 1860,1672 1896,1636 P2.3
PB10: P4.12 U2.46 | length 838.4
  Top Layer w10: P4.12 621,71 558.1,133.9 506.1,133.9 476,164 476,249.29 U2.46
PB11: P4.11 U2.47 | length 907.8
  Top Layer w10: P4.11 725,71 648,148 516,148 492,172 492,245.63 526.37,280 534.53,280 U2.47
PB12: P4.10 U2.51 | length 1020.1
  Top Layer w10: P4.10 843,71 940,168 1264,168 1312,216 1312,316.88 1043.41,585.47 U2.51
PB13: P4.9 U2.52 | length 958.9
  Top Layer w10: P4.9 947,71 1030.1,154.1 1274.1,154.1 1332,212 1332,326.28 U2.52
PB14: P4.8 U2.53 | length 894.3
  Top Layer w10: P4.8 1103.45,140.2 1284.2,140.2 1348,204 1348,338.11 U2.53
PB15: P4.7 U2.54 | length 835.5
  Top Layer w10: U2.54 1368,345.95 1368,196 1298.3,126.3 1202.3,126.3 1147,71 P4.7
PC0: P3.9 U2.15 | length 621
  Top Layer w10: P3.9 582.38,1328 692.48,1217.9 730.22,1180.16 U2.15
PC1: P3.10 U2.16 | length 745.1
  Top Layer w10: P3.10 128,1272 240,1272 280,1312 568.99,1312 676.99,1204 U2.16
PC2: P3.11 U2.17 | length 618.1
  Top Layer w10: P3.11 220,1228 289.9,1297.9 555.25,1297.9 U2.17@700.83,1152.32
PC3: P3.12 U2.18 | length 736.1
  Top Layer w10: P3.12@72.91,1228 116.91,1184 200,1184 300,1284 539.75,1284 686.91,1136.85 U2.18
PC4: P3.23 U2.32 | length 589.4
  Top Layer w10: P3.23 464.97,628 U2.32
PC5: P3.24 U2.33 | length 743.9
  Top Layer w10: P3.24 128,572 436.8,572 U2.33
PC6: P2.30 U2.63 | length 762
  Top Layer w10: U2.63 1636.5,328 P2.30
PC7: P2.29 U2.64 | length 853.9
  Top Layer w10: U2.64 1620.34,372 1852,372 P2.29
PC8: P2.28 U2.65 | length 704.3
  Top Layer w10: U2.65 1592.18,428 P2.28
PC9: P2.27 U2.66 | length 796.2
  Top Layer w10: U2.66 1576.02,472 1852,472 P2.27
PC10: P2.20 U2.78 | length 567.5
  Top Layer w10: U2.78 1351.19,1067.25 1377.84,1093.9 1530.1,1093.9 1696,928 P2.20
PC11: P2.19 U2.79 | length 687.4
  Top Layer w10: U2.79 1337.27,1081.17 1364.1,1108 1548,1108 1784,872 1852,872 P2.19
PC12: P2.18 U2.80 | length 567.4
  Top Layer w10: U2.80 1323.35,1095.09 1352.27,1124 1600,1124 P2.18
PC13: P3.7 R11.1 U2.7 | length 1308.1
  Top Layer w10: P3.7 182.86,1428 202.86,1408 v1(600,1408) 723.54,1408 801.26,1330.28 U2.7 ; v1(760,1568) 996.32,1568 R11.1
  Bottom Layer w10: v1(600,1408) v1(760,1568)
PC14: C7.1 U2.8 X2.2 | length 196.8
  Top Layer w10: U2.8 855.66,1248.03 877.41,1248.03 881.38,1252 v1(884,1252)
  Bottom Layer w10: v1(884,1252) 914.53,1252 920.45,1246.08 C7.1 973.36,1202.8 X2.2
PC15: C8.1 U2.9 X2.1 | length 184.2
  Top Layer w10: U2.9 813.81,1262.12 851.93,1224 v1(852,1224)
  Bottom Layer w10: v1(852,1224) 858.08,1217.92 C8.1 902.96,1133.2 X2.1
PD0: P2.17 U2.81 | length 688.8
  Top Layer w10: U2.81 1338.87,1140 1620,1140 1784,976 1848,976 P2.17
PD1: P2.16 U2.82 | length 568.8
  Top Layer w10: U2.82 1295.51,1122.93 1328.59,1156 1656,1156 1784,1028 P2.16
PD2: P2.15 U2.83 | length 690.2
  Top Layer w10: U2.83 1315.19,1172 1688,1172 1784,1076 1848,1076 P2.15
PD3: P2.14 U2.84 | length 570.2
  Top Layer w10: U2.84 1303.35,1188 1716,1188 1766.43,1137.57 1786.43,1137.57 P2.14
PD4: P2.13 U2.85 | length 691.6
  Top Layer w10: U2.85 1291.52,1204 1732,1204 1756,1180 1824,1180 1866.43,1137.57 1886.43,1137.57 P2.13
PD5: P2.12 U2.86 | length 578.3
  Top Layer w10: U2.86 1279.84,1220.16 1280,1220 1788,1220 P2.12
PD6: P2.11 U2.87 | length 722.8
  Top Layer w10: U2.87 1267.84,1236 1420,1236 1456,1272 1852,1272 P2.11
PD7: P2.10 U2.88 | length 635.9
  Top Layer w10: U2.88 1256,1252 1416,1252 1492,1328 P2.10
PD8: P4.6 U2.55 | length 774.2
  Top Layer w10: U2.55 1388,353.79 1388,192 1272.45,76.45 1239.7,76.45 P4.6
PD9: P4.5 U2.56 | length 738.4
  Top Layer w10: U2.56 1408,361.63 1408,156 1334.25,82.25 P4.5
PD10: P4.4 U2.57 | length 726.8
  Top Layer w10: U2.57 1163.8,633.67 1434.25,363.22 P4.4
PD11: P4.3 U2.58 | length 781.2
  Top Layer w10: U2.58 1540,285.31 1540,76.75 P4.3
PD12: P4.2 U2.59 | length 826
  Top Layer w10: U2.59 1634.25,218.9 P4.2
PD13: P4.1 U2.60 | length 875.6
  Top Layer w10: U2.60 1734.25,146.74 P4.1
PD14: P2.32 U2.61 | length 819.8
  Top Layer w10: U2.61 1680.83,228 P2.32
PD15: P2.31 U2.62 | length 911.6
  Top Layer w10: U2.62 1664.66,272 1815.23,272 1851,236.23 1887.76,236.23 P2.31
PE0: P2.2 U2.97 | length 875
  Top Layer w10: U2.97 1149.45,1396 1400,1396 1732,1728 P2.2
PE1: P2.1 U2.98 | length 1020.1
  Top Layer w10: U2.98 1102.87,1377.26 1103.76,1377.26 1114.74,1388.24 1114.74,1389.13 1137.61,1412 1396,1412 1756,1772 1852,1772 P2.1
PE2: P3.1 U2.1 | length 899.9
  Top Layer w10: P3.1 248,1652 414.3,1485.7 812.87,1485.7 U2.1
PE3: P3.2 U2.2 U3.2 | length 1548.9
  Top Layer w10: P3.2 124,1676 204,1676 408.2,1471.8 798.93,1471.8 U2.2
  Bottom Layer w10: P3.2 72,1740 260,1928 471.09,1928 513.69,1885.4 U3.2
PE4: P3.3 U2.3 | length 842.2
  Top Layer w10: P3.3 228,1628 398.1,1457.9 784.99,1457.9 U2.3
PE5: P3.4 U2.4 | length 934.1
  Top Layer w10: P3.4 81.57,1618.43 101.57,1618.43 140,1580 252,1580 388,1444 771.05,1444 U2.4
PE6: P3.5 U2.5 | length 784.5
  Top Layer w10: P3.5 284,1528 384,1428 759.21,1428 U2.5
PE7: P3.28 U2.37 | length 859.4
  Top Layer w10: P3.28 128,372 344.04,372 727.09,755.05 731.21,755.05 U2.37
PE8: P3.29 U2.38 | length 762.5
  Top Layer w10: P3.29 332,328 U2.38
PE9: P3.30 U2.39 | length 917.1
  Top Layer w10: P3.30 128,272 303.84,272 U2.39
PE10: P3.31 U2.40 | length 820.3
  Top Layer w10: P3.31 287.68,228 746.38,686.7 U2.40
PE11: P3.32 U2.41 | length 978.1
  Top Layer w10: P3.32 85.53,228 98.95,214.58 102.22,214.58 148.8,168 255.52,168 U2.41
PE12: P4.16 U2.42 | length 867.4
  Top Layer w10: P4.16 234.25,118.9 U2.42
PE13: P4.15 U2.43 | length 820.4
  Top Layer w10: P4.15 334.25,195.17 455.5,316.42 455.5,316.72 808.54,669.76 811.4,669.76 826.1,684.46 U2.43
PE14: P4.14 U2.44 | length 768.3
  Top Layer w10: P4.14 434.25,263.22 U2.44
PE15: P4.13 U2.45 | length 780.2
  Top Layer w10: P4.13 460,145.25 460,261.13 U2.45
USB_CC1: J1.5 R4.2 | length 187.4
  Top Layer w10: v1(628,1552) 628.45,1552.45 628.45,1667.59 J1.5
  Bottom Layer w10: R4.2 606.46,1550.15 626.15,1550.15 v1(628,1552)
USB_CC2: J1.12 R5.2 | length 152.7
  Top Layer w10: J1.12 491.1,1552.9 v1(492,1552)
  Bottom Layer w10: R5.2 v1(492,1552)
VBAT: C13.1 D5.3 U2.6 | length 227
  Top Layer w10: v1(808,1352) 808,1351.69 855.5,1304.19 U2.6
  Bottom Layer w10: D5.3 760,1316 788,1316 808,1336 808,1354.62 805.92,1356.7 C13.1
VBAT_Pin: D5.1 P3.6 | length 666.2
  Bottom Layer w10: P3.6 120,1480 244,1480 384,1340 605.18,1340 D5.1
VBUS: D4.1 J1.3 J1.4 J1.13 J1.14 SB1.2 | length 1087.9
  Top Layer w15: J1.14 J1.13 471.42,1703.42 508,1740 616,1740 647.68,1708.32 647.68,1668.94 J1.4 J1.3 661.3,1667.13 661.3,1565.86 680.41,1546.74 1190.53,1546.74 D4.1 1262.72,1545.28 1277,1531 SB1.2
VREF+: C11.1 C12.1 P3.14 R7.1 U2.20 | length 924.4
  Top Layer w10: v1(612,1160) 612,1158.82 660.62,1110.19 U2.20
  Bottom Layer w10: P3.14 128,1072 236.35,1072 344.35,1180 R7.1@532,1180 ; R7.1 594.94,1179.68 642.43,1132.19 642.43,1049.41 C12.1 C11.1
pads on no net: J1.0 J1.6 J1.11

## Polygon pours and split planes (outlines as drawn)
GND on Top Layer "Polygon_TOP_GND" (solid, remove dead copper, pour order 0): 1968.25,-0.25 1968.25,1968.25 -0.25,1968.25 -0.25,-0.25
GND on Bottom Layer "Polygon_Bottom_GND" (solid, remove dead copper, pour order 1): 1968.25,-0.25 1968.25,1968.25 -0.25,1968.25 -0.25,-0.25

## Keep-outs
Keep-Out Layer:
  lines w15: -7.75,-0.25 ccw(c-0.25,-0.25) -0.25,-7.75 ; -7.75,-0.25 ccw(c-0.25,-0.25) -0.25,-7.75 ; -7.75,-0.25 -7.75,1968.25 ; -7.75,1968.25 cw(c-0.25,1968.25) -0.25,1975.75 ; -7.75,1968.25 cw(c-0.25,1968.25) -0.25,1975.75 ; -0.25,-7.75 1968.25,-7.75 ; -0.25,1975.75 1968.25,1975.75 ; 1968.25,-7.75 ccw(c1968.25,-0.25) 1975.75,-0.25 ; 1968.25,-7.75 ccw(c1968.25,-0.25) 1975.75,-0.25 ; 1968.25,1975.75 cw(c1968.25,1968.25) 1975.75,1968.25 ; 1968.25,1975.75 cw(c1968.25,1968.25) 1975.75,1968.25 ; 1975.75,-0.25 1975.75,1968.25 ; 7.25,7.25 7.25,1960.75 1960.75,1960.75 1960.75,7.25 7.25,7.25

## Silkscreen, mask and mechanical layers (free items; w line width, h text height)
Top Overlay:
  lines w7.87: 184,22 1784,22 1784,122 259,122 184,122 184,22 ; 508,182 508,282 583,282 1308,282 1308,182 508,182
  lines w10: 20,180 20,1780 220,1780 220,180 20,180 ; 1748,176 1748,1776 1948,1776 1948,176 1748,176
  text "NR" at 819,1911 h30
  text "B0" at 947,1911 h30
  text "K1" at 1079,1911 h30
  text "STM32H743" at 1149.9,1328 h30 r315
Bottom Overlay:
  region: 1664,1840.21 1260,1840.21 1260,1791.79 1664,1791.79
  text "DIO" at 1495,1879 h30 r270
  text "CLK" at 1395,1867 h30 r270
  text "3V3" at 1595,1863 h30 r270
  text "GND" at 1295,1859 h30 r270
  text "PE3" at 75,1793 h20
  text "PE2" at 203,1793 h20
  text "PE0" at 1827,1793 h20
  text "PE1" at 1939,1793 h20
  text "PB8" at 1605,1615 h30
  text "PB9" at 1709,1615 h30
  text "PE5" at 337,1611 h30
  text "PE4" at 445,1611 h30
  text "VB" at 309,1515 h30
  text "PE6" at 441,1515 h30
  text "PB6" at 1605,1515 h30
  text "PB7" at 1709,1515 h30
  text "PB4" at 1609,1419 h30
  text "PB5" at 1709,1419 h30
  text "NR" at 309,1415 h30
  text "PC13" at 453,1415 h30
  text "PC1" at 329,1315 h30
  text "PC0" at 441,1315 h30
  text "PD7" at 1605,1315 h30
  text "PB3" at 1709,1315 h30
  text "PC3" at 337,1215 h30
  text "PC2" at 441,1215 h30
  text "PD5" at 1605,1215 h30
  text "PD6" at 1709,1215 h30
  text "PD3" at 1605,1119 h30
  text "PD4" at 1709,1119 h30
  text "V+" at 309,1115 h30
  text "GND" at 441,1115 h30
  text "PA1" at 337,1019 h30
  text "PA0" at 441,1019 h30
  text "PD1" at 1605,1015 h30
  text "PD2" at 1709,1015 h30
  text "PA3" at 337,919 h30
  text "PA2" at 441,919 h30
  text "PC12" at 1589,911 h30
  text "PD0" at 1709,911 h30
  text "PA5" at 337,819 h30
  text "PA4" at 441,819 h30
  text "PC10" at 1585,815 h30
  text "PC11" at 1709,815 h30
  text "PA12" at 1585,719 h30
  text "PA15" at 1709,719 h30
  text "PA7" at 337,715 h30
  text "PA6" at 441,715 h30
  text "PA10" at 1585,619 h30
  text "PA11" at 1709,619 h30
  text "PC5" at 337,615 h30
  text "PC4" at 441,615 h30
  text "PB1" at 337,515 h30
  text "PB0" at 441,515 h30
  text "PA8" at 1605,515 h30
  text "PA9" at 1709,515 h30
  text "PE7" at 337,415 h30
  text "PB2" at 441,415 h30
  text "PC8" at 1605,415 h30
  text "PC9" at 1709,415 h30
  text "PE9" at 337,315 h30
  text "PE8" at 441,315 h30
  text "PC6" at 1605,315 h30
  text "PC7" at 1709,315 h30
  text "GND" at 579,301 h20
  text "GND" at 683,301 h20
  text "GND" at 783,301 h20
  text "GND" at 883,301 h20
  text "3V3" at 983,301 h20
  text "3V3" at 1083,301 h20
  text "5V" at 1175,301 h20
  text "5V" at 1275,301 h20
  text "PE11" at 353,219 h30
  text "PE10" at 477,219 h30
  text "PD14" at 1581,215 h30
  text "PD15" at 1709,215 h30
  text "PE12" at 271,133 h20
  text "PE13" at 371,133 h20
  text "PE14" at 471,133 h20
  text "PE15" at 571,133 h20
  text "PB10" at 671,133 h20
  text "PB11" at 767,133 h20
  text "PB12" at 871,133 h20
  text "PB13" at 971,133 h20
  text "PB14" at 1071,133 h20
  text "PB15" at 1171,133 h20
  text "PD8" at 1259,133 h20
  text "PD9" at 1359,133 h20
  text "PD10" at 1471,133 h20
  text "PD11" at 1567,133 h20
  text "PD12" at 1667,133 h20
  text "PD13" at 1771,133 h20

## Text inside footprints (layer, text, board x,y; h text height)
P1: Top Overlay "3V3" at 1583,1841 h20 r90; Top Overlay "CLK" at 1382.59,1840.67 h20 r90; Top Overlay "DIO" at 1483,1845 h20 r90; Top Overlay "GND" at 1283,1841 h20 r90